# Altium PCB GPSRMC_Emulator.PcbDoc
Units mil, origin at the board's own origin, x right, y up, seen from the top; angles counter-clockwise.
Board outline 1259.84 x 1576.77 mil, 2 copper layers (Top Layer, Top, Bottom Layer, Bottom); 15 components, 17 nets, 67 pads, 35 vias.
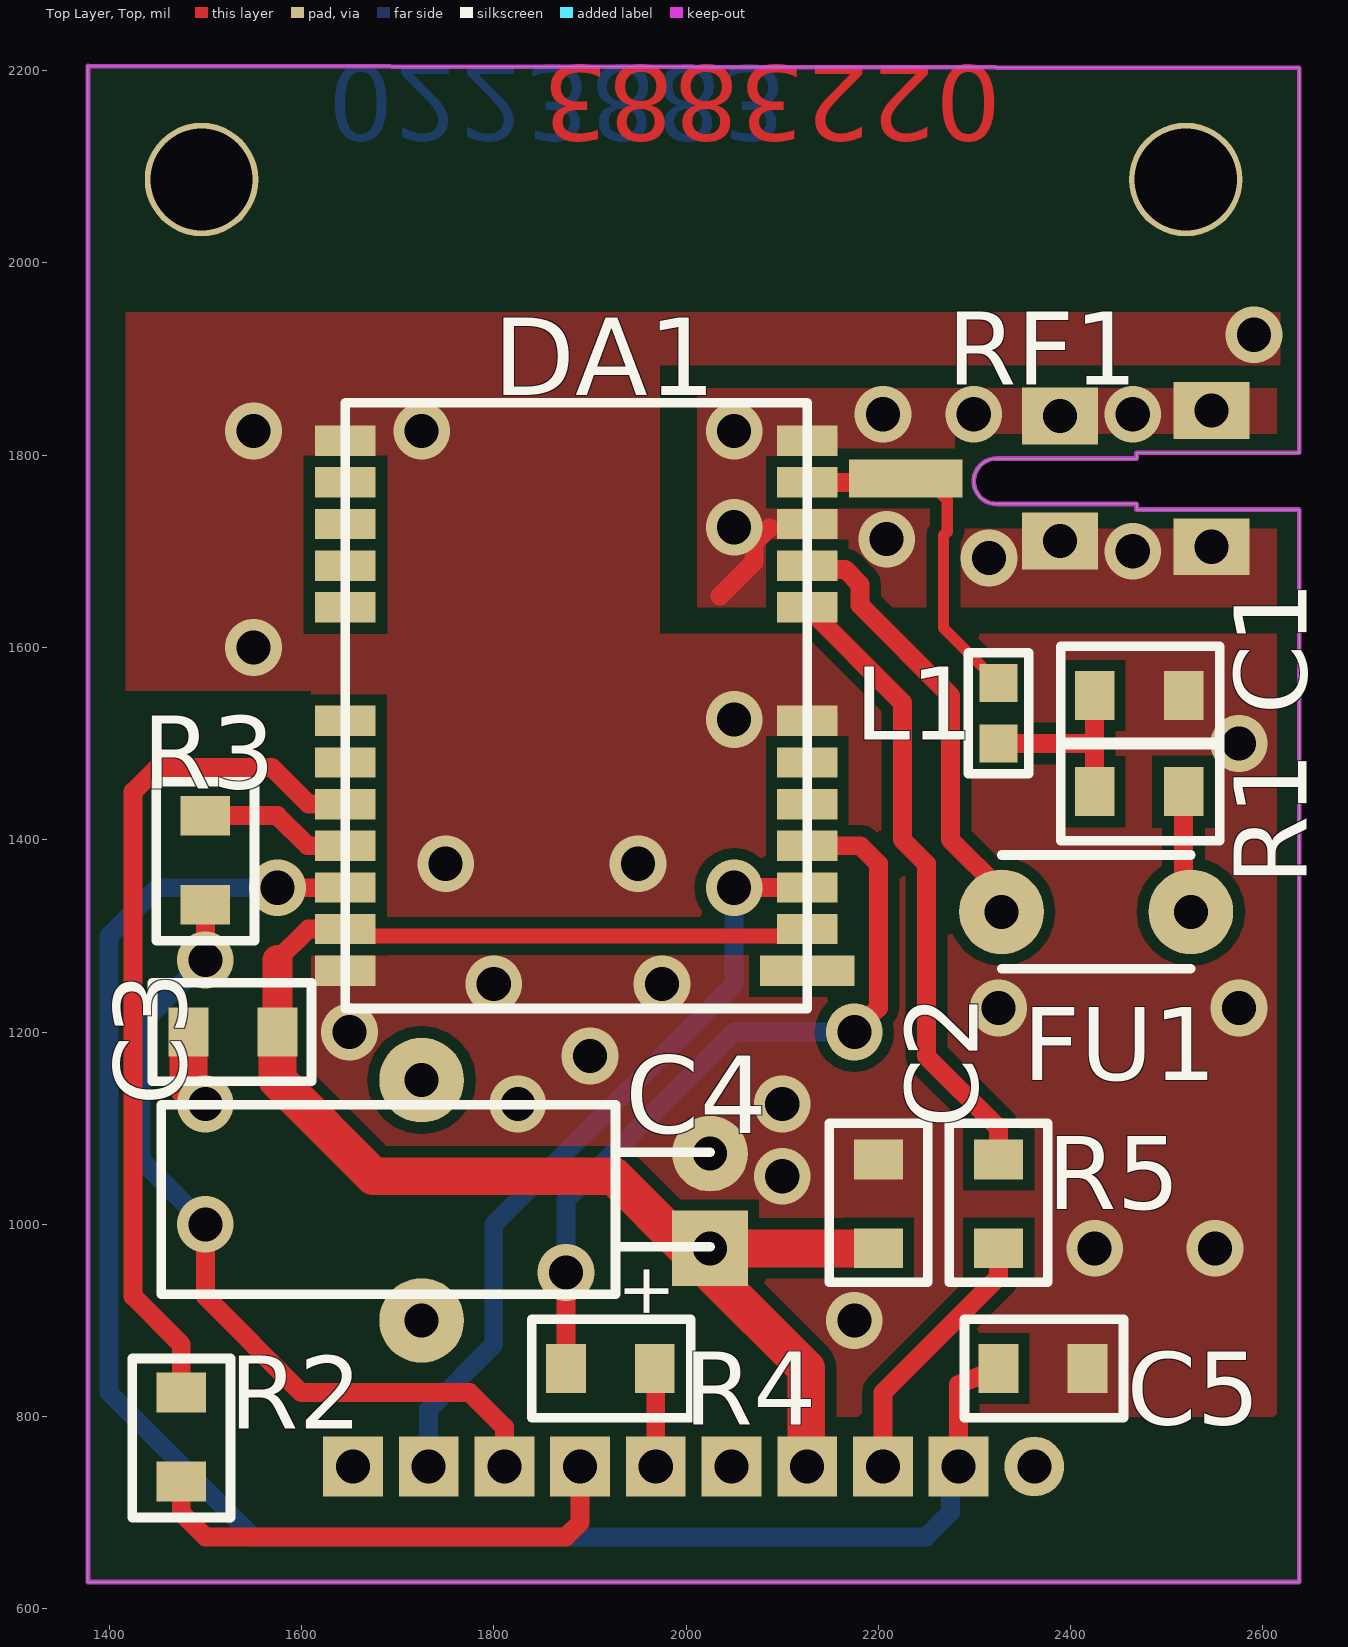
[diagram p0: Top Layer, Top view]
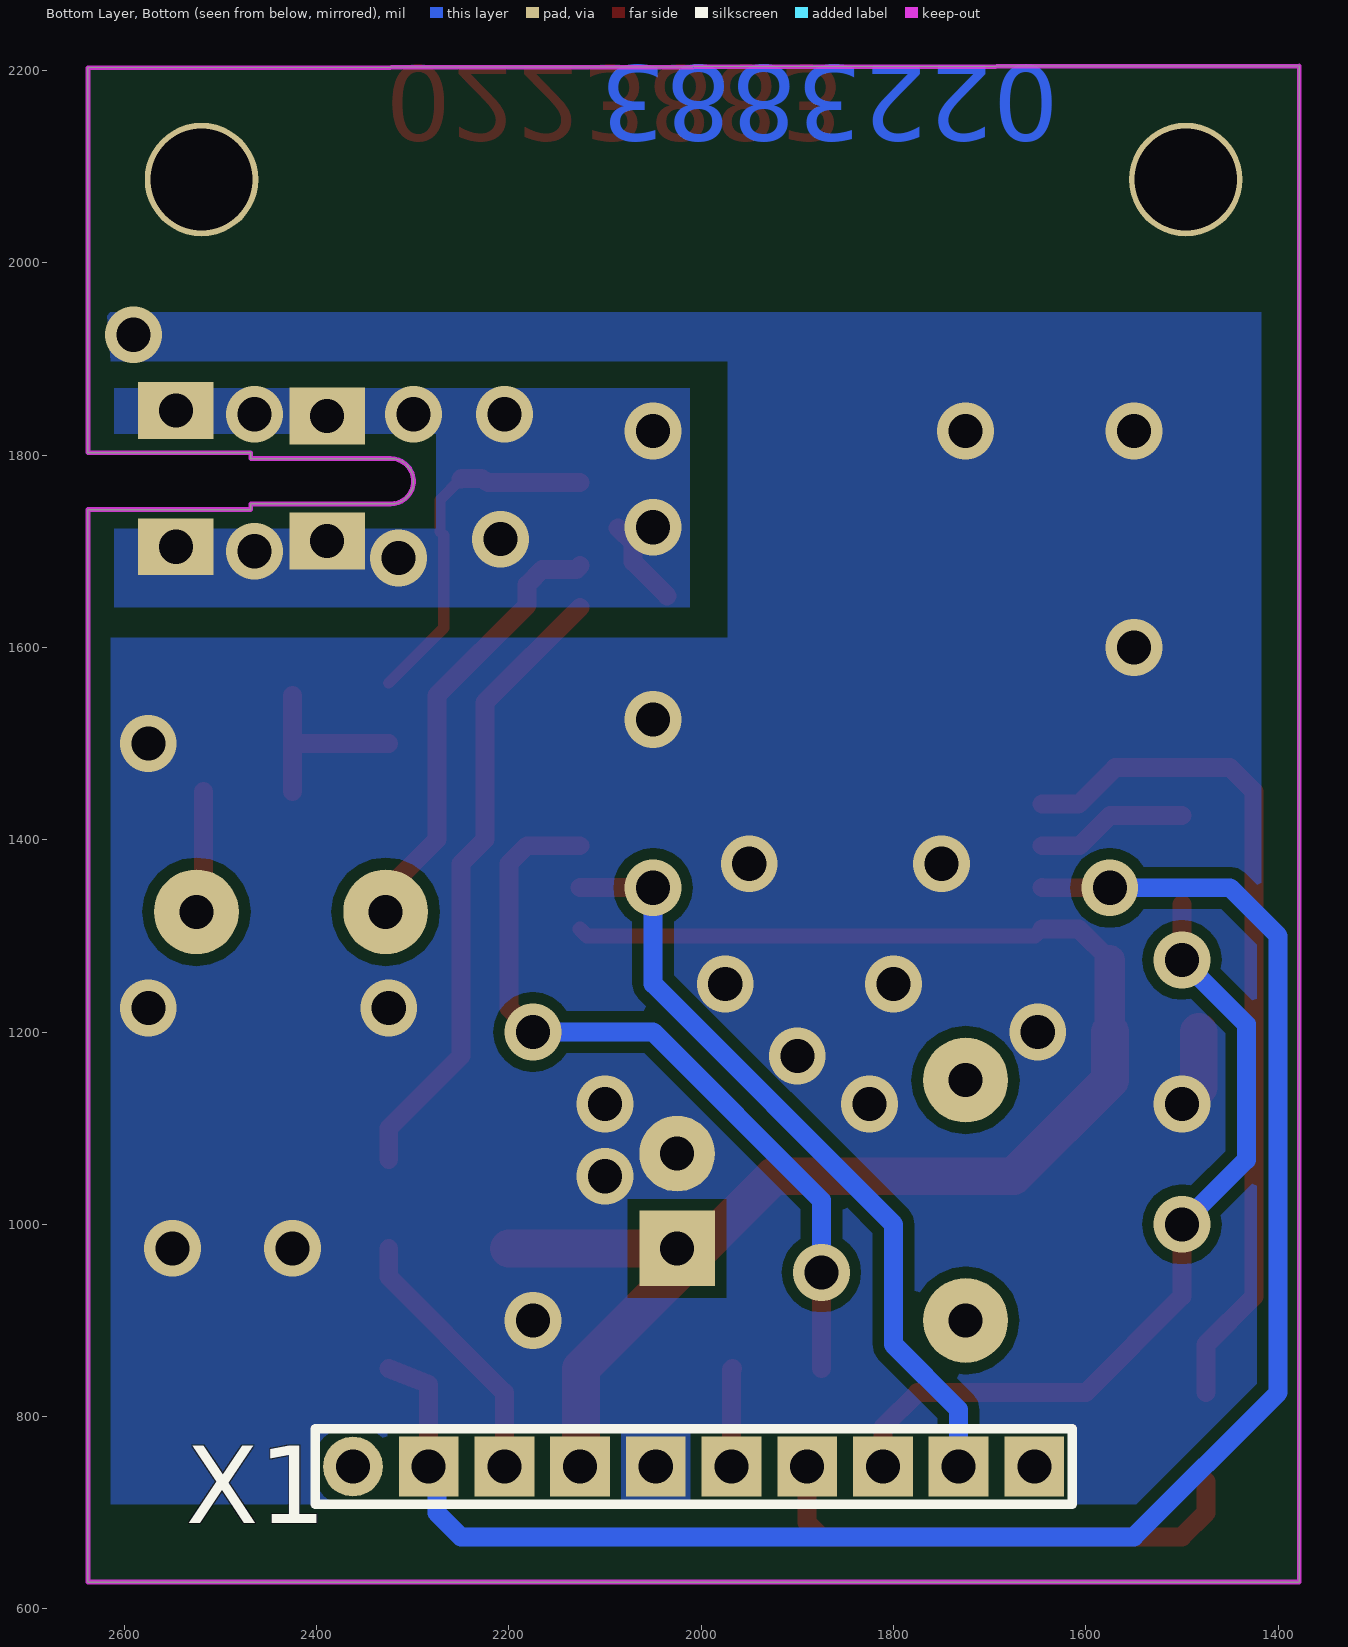
[diagram p1: Bottom Layer, Bottom view, seen from below]

## Layer stack, top to bottom
Top Solder, Top Mask: solder mask 0.4, Solder Resist, Dk 3.5
Top Layer, Top: signal copper 1.4
Dielectric 1: dielectric 12.6, FR-4, Dk 4.8
Bottom Layer, Bottom: signal copper 1.4
Bottom Solder, Bot Mask: solder mask 0.4, Solder Resist, Dk 3.5

## Board outline
1377.95,627.95 2637.8,627.95 2637.8,1743.31 2468.5,1743.31 2468.5,1749.21 2322.83,1749.21 cw(c2322.83,1772.83) 2322.83,1796.46 2468.5,1796.46 2468.5,1802.36 2637.8,1802.36 2637.8,2202.76 1377.95,2204.72

## Design rules (kind name [scope] priority, off if disabled: settings)
Clearance [All] p1: gap=11.81 ignorepadtopadclearanceinfootprint=FALSE
PlaneClearance [All] p1: clearance=10
PolygonConnect PolygonConnect_8 [IsPolygon And InNet('GND') And OnLayer('Bottom Layer, Bottom') vs IsVia] p1: connectstyle=Direct reliefconductorwidth=15 reliefentries=4 polygonreliefangle="90 Angle" airgapwidth=10
PolygonConnect PolygonConnect_7 [IsPolygon And InNet('GND') And OnLayer('Bottom Layer, Bottom') vs IsPad] p2: connectstyle=Direct reliefconductorwidth=15 reliefentries=4 polygonreliefangle="90 Angle" airgapwidth=10
PolygonConnect PolygonConnect_6 [IsPolygon And InNet('GND_RF') And OnLayer('Bottom Layer, Bottom') vs IsVia] p3: connectstyle=Direct reliefconductorwidth=15 reliefentries=4 polygonreliefangle="90 Angle" airgapwidth=10
PolygonConnect PolygonConnect_5 [IsPolygon And InNet('GND_RF') And OnLayer('Bottom Layer, Bottom') vs IsPad] p4: connectstyle=Direct reliefconductorwidth=15 reliefentries=4 polygonreliefangle="90 Angle" airgapwidth=10
PolygonConnect PolygonConnect_4 [IsPolygon And InNet('GND') And OnLayer('Top Layer, Top') vs IsVia] p5: connectstyle=Direct reliefconductorwidth=15 reliefentries=4 polygonreliefangle="90 Angle" airgapwidth=10
PolygonConnect PolygonConnect_3 [IsPolygon And InNet('GND') And OnLayer('Top Layer, Top') vs IsPad] p6: connectstyle=Direct reliefconductorwidth=15.75 reliefentries=4 polygonreliefangle="90 Angle" airgapwidth=10
PolygonConnect PolygonConnect_2 [IsPolygon And InNet('GND_RF') And OnLayer('Top Layer, Top') vs IsVia] p7: connectstyle=Direct reliefconductorwidth=15 reliefentries=4 polygonreliefangle="90 Angle" airgapwidth=10
PolygonConnect PolygonConnect_1 [IsPolygon And InNet('GND_RF') And OnLayer('Top Layer, Top') vs IsPad] p8: connectstyle=Direct reliefconductorwidth=15 reliefentries=4 polygonreliefangle="90 Angle" airgapwidth=10
PolygonConnect [All] p9: connectstyle=Relief reliefconductorwidth=10 reliefentries=4 polygonreliefangle="90 Angle" airgapwidth=10
RoutingVias [All] p1: holewidth=28 width=50 viastyle="Through Hole" minholewidth=28 minwidth=50 maxholewidth=28 maxwidth=50
SolderMaskExpansion [All] p1: expansion=4
Width Net_Width_1 [InNet('NET00003')] p1: maxlimit=11.81 minlimit=11.81 preferedwidth=11.81
Width [All] p2: maxlimit=10 minlimit=10 preferedwidth=10
29 further rules are at their usual default settings.

## Classes and differential pairs
net class POWER: +3,3V GND

## Components (designator, comment, footprint, x,y, rotation, side; value= is the part's Value field where it differs from the comment)
C1 "10nF" "ЧИП 0805" 2425,1550 r0 top
C2 "4.7" "ЧИП 0805" 2200,975 r90 top
C3 "1.0" "ЧИП 0805" 1575,1200 r180 top
C4 "10x10v" CP5_25G_5-25_k-mirr 2025,975 r270 top
C5 "0.1" "ЧИП 0805" 2325,850 r0 top
DA1 "" SIRIUS-1612R 2125.98,1263.78 r180 top
FU1 "0,05A*" C5_Primary 2525,1325 r180 top
L1 "" "ЧИП 0603" 2325,1500 r90 top
R1 "100" "ЧИП 0805" 2425,1450 r0 top
R2 "100" "ЧИП 0805" 1475,825 r270 top
R3 "100" "ЧИП 0805" 1500,1425 r270 top
R4 "100" "ЧИП 0805" 1875,850 r0 top
R5 "220" "ЧИП 0805" 2325,975 r90 top
RF1 "" АНТ_КАБЕЛЬ 2228.35,1775.59 r180 top
X1 "" PLS2_10 2362.2,748.03 r90 bottom

## Footprints (in the part's own frame and the unit in brackets; to place one, negate y for a bottom-side part, rotate by r counter-clockwise, add the part's x,y. Pads: shape width x height; smd on the part's side, far side on the other; paste and mask are expansions set on the pad)
C5_Primary [mm]
  round 2.24 hole 0.9: 1(0,0) 2(5,0)
  silkscreen extent 0,-1.5 5,1.5
CP5_25G_5-25_k-mirr [mm]
  rect 2x2 hole 0.9: 1(0,0)
  round 2 hole 0.9: 2(-2.5,0)
  round 2.24 hole 0.9: 3(-4.445,-7.62) 4(1.905,-7.62)
  silkscreen extent -3.79,-14.5 1.21,0
PLS2_10 [mm]
  round 1.58 hole 0.9: 1(0,0)
  rect 1.58x1.58 hole 0.9: 2(0,-2) 3(0,-4) 4(0,-6) 5(0,-8) 6(0,-10) 7(0,-12) 8(0,-14) 9(0,-16) 10(0,-18)
  silkscreen extent -1,-19 1,1
SIRIUS-1612R [mm]
  rect 2.5x0.8 smd: 1(0,0)
  rect 1.6x0.8 smd: 2(0,-1.1) 3(0,-2.2) 4(0,-3.3) 5(0,-4.4) 6(0,-5.5) 7(0,-6.6) 8(0,-9.6) 9(0,-10.7) 10(0,-11.8) 11(0,-12.9) 12(0,-14) 13(12.2,-14) 14(12.2,-12.9) 15(12.2,-11.8) 16(12.2,-10.7) 17(12.2,-9.6) 18(12.2,-6.6) 19(12.2,-5.5) 20(12.2,-4.4) 21(12.2,-3.3) 22(12.2,-2.2) 23(12.2,-1.1) 24(12.2,0)
  silkscreen extent 0,-15 12.2,1
АНТ_КАБЕЛЬ [mm]
  rect 2x1.5 hole 0.9: 1(-4.08,1.65) 3(-4.08,-1.65) 4(-8.08,1.8) 5(-8.08,-1.8)
  rect 3x1 smd: 2(0,0)
"ЧИП 0603" [mm]
  rect 1x1 smd: 1(0,0) 2(1.6,0)
  silkscreen extent -0.8,-0.8 2.4,0.8
"ЧИП 0805" [mm]
  rect 1.05x1.3 smd: 1(0,0) 2(2.35,0)
  silkscreen extent -0.9,-1.3 3.3,1.3

## Free pads (board coordinates)
  round 118.11 hole 106.3: 0(1496.06,2086.61) 0(2519.68,2086.61)

## Via types
v1: diameter 59.06, hole 35.43, Top Layer, Top to Bottom Layer, Bottom, 35 vias

## Nets (pads, with @x,y where several pads share a name; then routed paths per layer and width w, separated by ;. In a path a pad name is that pad's centre, name@x,y a point inside that pad or via, vN(x,y) a via of type N, cw(c..) or ccw(c..) an arc to the next point about the centre after c; other vN are vias at no path point)
+3,3V: C2.1 C3.1 C4.1 DA1.2 DA1.23 X1.4 | length 1679.1
  Top Layer, Top w15.75: DA1.23 1652.76,1300 2118.9,1300 DA1.2
  Top Layer, Top w19.68: 1575,1275 1607.09,1307.09 DA1.23
  Top Layer, Top w31.5: C3.1 1575,1275
  Top Layer, Top w39.37: C3.1 1575,1150 1675,1050 1925,1050 2000,975 C4.1 ; C4.1@2012.5,987.5 C4.1 ; X1.4 2125,749.02 2125,850 2025,950 C4.1 ; C2.1 C4.1
GND: C1.2 C2.2 C3.2 C4.2 C5.2 DA1.7 DA1.13 DA1.24 X1.5 | length 82.3
  Top Layer, Top w39.37: C3.2 1482.48,1142.52 v1(1500,1125)
  other v1: 2175,900 2425,975 2550,975 2100,1050 1825,1125 2100,1125 1900,1175 1650,1200 2325,1225 2575,1225 1800,1250 1975,1250 1750,1375 1950,1375 2575,1500 2050,1525 1550,1600 1550,1825 1725,1825 2590.55,1925.2
GND_RF: DA1.10 DA1.12 RF1.1 RF1.3 RF1.4 RF1.5 | length 111.1
  Top Layer, Top w19.68: 2035.43,1653.54 2070.87,1688.98 2070.87,1708.66 2086.61,1724.41 ; v1@2299.21,1700.79 2307.09,1700.79 v1(2314.96,1692.91)
  other v1: 2464.57,1700 2208.66,1712.6 2050,1725 2050,1825 2204.72,1842.52 2299.21,1842.52 2464.57,1842.52
INT: R4.2 X1.6 | length 102.4
  Top Layer, Top w19.68: R4.2 1968.5,849.02 X1.6
NET00000: FU1.1 R1.2 | length 128.1
  Top Layer, Top w19.68: R1.2 2517.52,1332.48 FU1.1
NET00001: DA1.8 R5.2 | length 656.6
  Top Layer, Top w19.68: DA1.8 2225,1542.72 2225,1400 2250,1375 2250,1175 2325,1100 R5.2
NET00002: DA1.20 R2.1 | length 892.5
  Top Layer, Top w19.68: R2.1 1475,875 1425,925 1425,1450 1450,1475 1569.54,1475 1607.53,1437.01 DA1.20
NET00003: DA1.11 L1.2 RF1.2 | length 393.3
  Top Layer, Top w11.81: RF1.2@2249.41,1775.59 2250,1775 2271.65,1753.35 2271.65,1720.47 2267.72,1716.54 2267.72,1620.28 L1.2
  Top Layer, Top w19.68: DA1.11 2221.65,1771.65 RF1.2 ; RF1.2@2249.41,1775.59 RF1.2 ; RF1.2@2250,1775 RF1.2
NET00004: DA1.21 R3.1 | length 158.6
  Top Layer, Top w19.68: R3.1 1575,1425 1606.3,1393.7 DA1.21
NET00006: DA1.4 R4.1 | length 814.6
  Top Layer, Top w19.68: R4.1 v1(1875,950) ; DA1.4 2181.3,1393.7 2200,1375 2200,1225 v1(2175,1200)
  Bottom Layer, Bottom w19.68: v1(1875,950) 1875,1025 2050,1200 v1(2175,1200)
NET00010: DA1.9 FU1.2 | length 464.5
  Top Layer, Top w19.68: DA1.9 2129.92,1681.1 2165.35,1681.1 2181.1,1665.35 2181.1,1643.9 2275,1550 2275,1400 2328.15,1346.85 FU1.2
NET00015: C1.1 L1.1 R1.1 | length 200
  Top Layer, Top w19.68: L1.1 2425,1500 ; R1.1 2425,1500 ; C1.1 2425,1500
RD: R2.2 X1.7 | length 522
  Top Layer, Top w19.68: R2.2 1475,700 1500,675 1875,675 1889.76,689.76 X1.7
RST: R5.1 X1.3 | length 276.8
  Top Layer, Top w19.68: X1.3 2204.72,825 2325,945.28 R5.1
SEC: DA1.3 X1.9 | length 809.7
  Top Layer, Top w19.68: v1(2050,1350) 2050.39,1350.39 DA1.3
  Bottom Layer, Bottom w19.68: X1.9 1732.28,807.28 1800,875 1800,1000 2050,1250 v1(2050,1350)
TD: R3.2 X1.8 | length 871.2
  Top Layer, Top w19.68: v1(1500,1000) 1500,925 1600,825 1775,825 1811.02,788.98 X1.8 ; v1(1500,1275) R3.2
  Bottom Layer, Bottom w19.68: v1(1500,1000) 1433.07,1066.93 1433.07,1208.07 v1(1500,1275)
VBAT: C5.1 DA1.22 X1.2 | length 1870.7
  Top Layer, Top w19.68: v1(1575,1350) 1645.28,1350 DA1.22 ; X1.2 2283.46,833.46 C5.1
  Bottom Layer, Bottom w19.68: v1(1575,1350) 1450,1350 1400,1300 1400,825 1550,675 2250,675 2275,700 2275,739.57 X1.2
pads on no net: C4.3 C4.4 DA1.1 DA1.5 DA1.6 DA1.14 DA1.15 DA1.16 DA1.17 DA1.18 DA1.19 X1.1 X1.10

## Polygon pours and split planes (outlines as drawn)
GND on Top Layer, Top (solid, remove dead copper, pour order 2): 1610.24,850.39 1675,850 2150,850 2150,800 2614.17,799.21 2614.17,1614.17 1972.44,1614.17 1972.44,1893.7 2618.11,1893.7 2618.11,1948.82 1417.32,1948.82 1417.32,1555.12 1610.24,1555.12
GND_RF on Top Layer, Top (solid, pour order 0): 2614.17,1869.29 2011.81,1869.29 2011.81,1641.73 2614.17,1641.73 2614.17,1723.62 2279.53,1723.62 2279.53,1822.05 2614.17,1822.05
GND on Bottom Layer, Bottom (solid, remove dead copper, pour order 6): 1417.32,708.66 2614.17,708.66 2614.17,1610.24 1972.44,1610.24 1972.44,1897.64 2614.17,1897.64 2618.11,1948.82 1417.32,1948.82
GND_RF on Bottom Layer, Bottom (solid, pour order 4): 2610.24,1869.29 2011.81,1869.29 2011.81,1641.73 2610.24,1641.73 2610.24,1723.62 2275.59,1723.62 2275.59,1822.05 2610.24,1822.05

## Keep-outs
Keep-Out Layer, Board:
  the board outline again, w5

## Other copper
Top Layer, Top:
  text "0223883" at 2327.95,2204.92 h78.12 r180
Bottom Layer, Bottom:
  text "0223883" at 1627.95,2204.92 h78.12 r180

## Silkscreen, mask and mechanical layers (free items; w line width, h text height)
Mechanical 1, Top Assy:
  lines w3.94: 2297.24,1598.43 2476.38,1598.43 ; 2299.21,1551.18 2476.38,1551.18 ; 2322.83,1547.24 2322.83,1584.65 2322.83,1602.36 ; 2454.72,1604.33 2643.7,1604.33 ; 2458.66,1545.28 2643.7,1545.28 ; 2468.5,1539.37 2468.5,1612.2 ; 2637.8,1547.24 2637.8,1602.36
  lines w7.87: 1338.58,629.92 1377.95,629.92 1377.95,590.55 ; 1338.58,2204.72 1377.95,2204.72 1377.95,2244.09 ; 2637.8,590.55 2637.8,629.92 2677.17,629.92 ; 2637.8,2244.09 2637.8,2204.72 2677.17,2204.72

## Text inside footprints (layer, text, board x,y; h text height)
C4: Top Overlay, Top Silk "+" at 1918.7,960.63 h90.55 r270